# Altium PCB sm_Arm_Board.PcbDoc
Units mil, origin at the board's own origin, x right, y up, seen from the top; angles counter-clockwise.
Board outline 1531 x 1354 mil, 2 copper layers (Top Layer, Bottom Layer); 15 components, 18 nets, 88 pads, 20 vias.
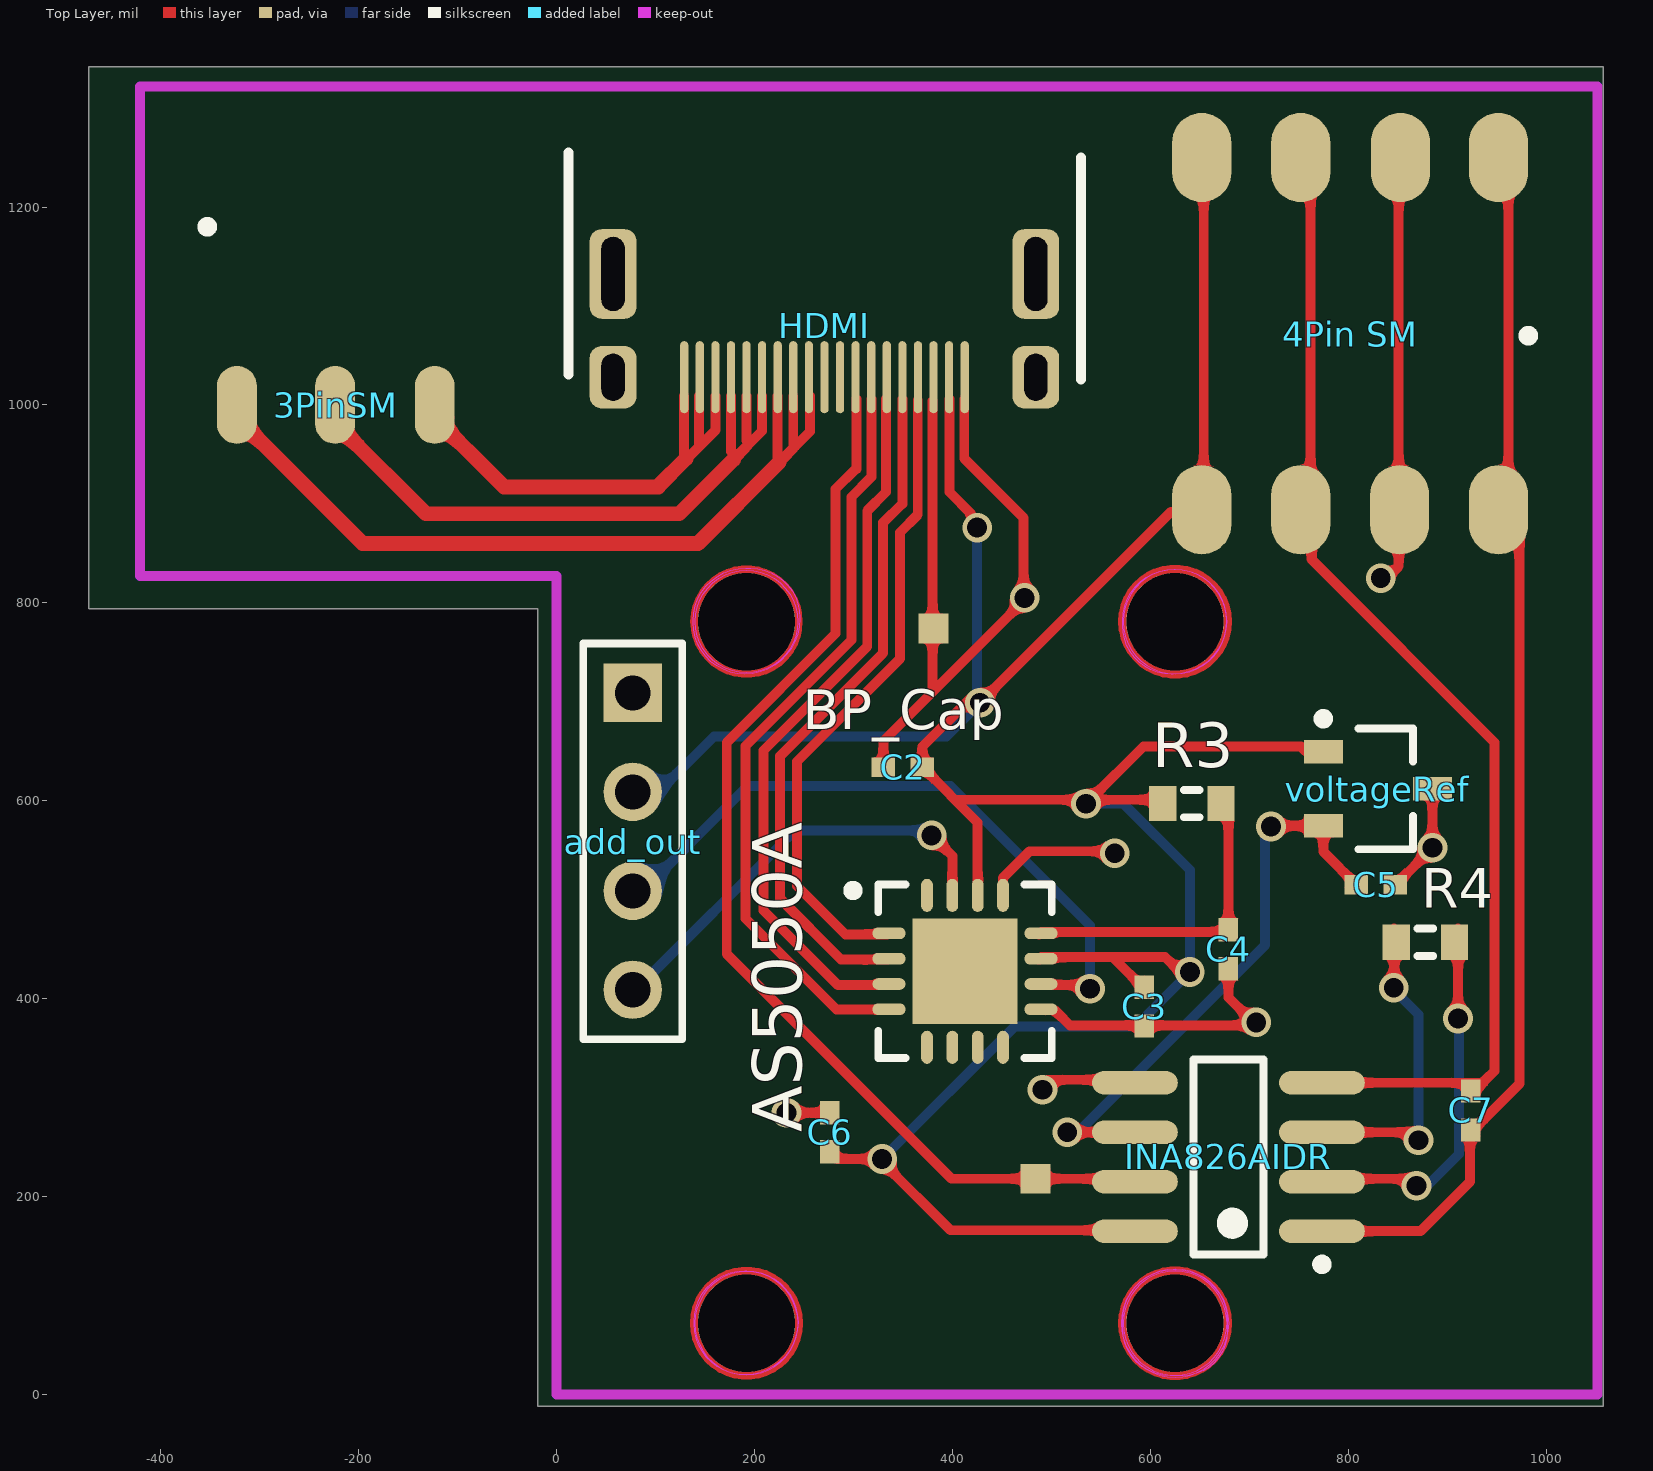
[diagram p0: Top Layer view]
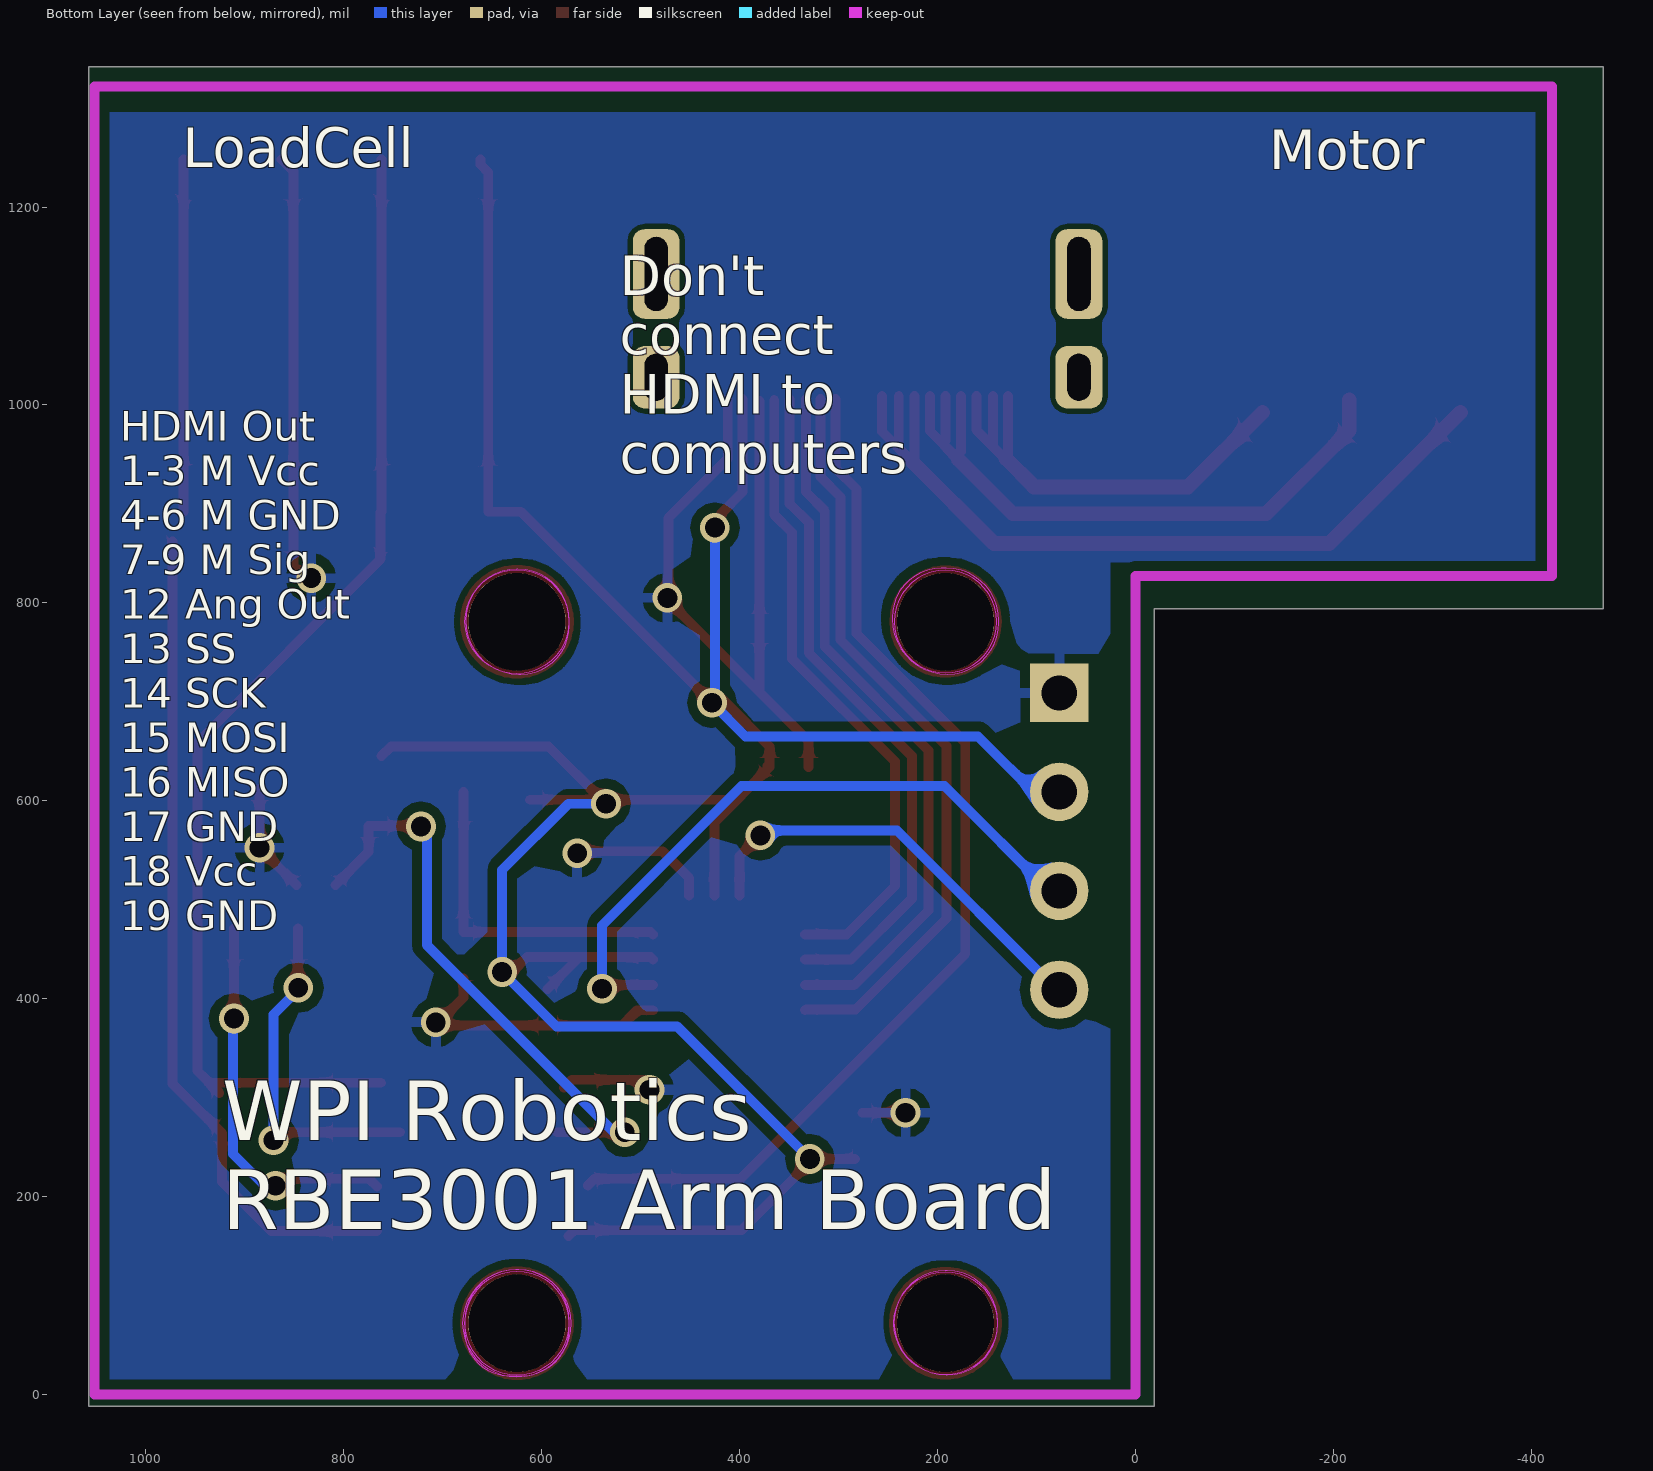
[diagram p1: Bottom Layer view, seen from below]

## Layer stack, top to bottom
Top Solder: solder mask 0.4, Solder Resist, Dk 3.5
Top Layer: signal copper 1.4
Dielectric 1: dielectric 12.6, FR-4, Dk 4.8
Bottom Layer: signal copper 1.4
Bottom Solder: solder mask 0.4, Solder Resist, Dk 3.5

## Board outline
-19,794 -19,-12 188,-12 1058,-12 1058,1342 -473,1342 -473,794
cut-out: 191.93,729.16 cw(c191.93,781) 140.09,781 cw(c191.93,781) 191.93,832.84 cw(c191.93,781) 243.77,781 cw(c191.93,781)
cut-out: 572.44,781 ccw(c625,781) 625,728.44 ccw(c625,781) 677.56,781 ccw(c625,781) 625,833.56 ccw(c625,781)
cut-out: 572.44,72 ccw(c625,72) 625,19.44 ccw(c625,72) 677.56,72 ccw(c625,72) 625,124.56 ccw(c625,72)
cut-out: 139.78,72 ccw(c191.93,72) 191.93,19.85 ccw(c191.93,72) 244.08,72 ccw(c191.93,72) 191.93,124.15 ccw(c191.93,72)
cut-out: 572.44,781 ccw(c625,781) 625,728.44 ccw(c625,781) 677.56,781 ccw(c625,781) 625,833.56 ccw(c625,781)
cut-out: 570.44,72 ccw(c625,72) 625,17.44 ccw(c625,72) 679.56,72 ccw(c625,72) 625,126.56 ccw(c625,72)
cut-out: 139.78,72 ccw(c191.93,72) 191.93,19.85 ccw(c191.93,72) 244.08,72 ccw(c191.93,72) 191.93,124.15 ccw(c191.93,72)
cut-out: 191.93,729.16 cw(c191.93,781) 140.09,781 cw(c191.93,781) 191.93,832.84 cw(c191.93,781) 243.77,781 cw(c191.93,781)
cut-out: 572,782 cw(c624,782) 624,834 625,834 cw(c625,782) 677,782 cw(c623,782) 623,728 621,728 cw(c621,777) 572,777
cut-out: 572,75 cw(c623,75) 623,126 626,126 cw(c626,74) 678,74 678,64 cw(c633,64) 633,19 620,19 cw(c620,67) 572,67
cut-out: 139,74 cw(c190,74) 190,125 192,125 cw(c192,73) 244,73 cw(c191,73) 191,20 190,20 cw(c190,71) 139,71
cut-out: 138,782 cw(c191,782) 191,835 196,835 cw(c196,785) 246,785 246,784 cw(c190,784) 190,728 cw(c190,780) 138,780

## Design rules (kind name [scope] priority, off if disabled: settings)
Clearance [InComponent('hdmi')] p1: gap=5
Clearance Clearance_2 [InNamedPolygon('BotGND')] p2: gap=10
Clearance Clearance_1 [(InNet('MOTOR_GND') AND InNet('MOTOR_SIG') AND InNet('MOTOR_VCC'))] p3: gap=12
Clearance Clearance_3 [All] p4: gap=6
ComponentClearance [All] p1: gap=10 collisioncheckmode=3 verticalgap=8 showdistances=FALSE
MinimumSolderMaskSliver [All] p1: minsoldermaskwidth=8
PolygonConnect [All] p1: connectstyle=Relief reliefconductorwidth=10 reliefentries=4 polygonreliefangle="90 Angle" airgapwidth=10
RoutingVias [All] p1: holewidth=28 width=50 viastyle="Through Hole" minholewidth=15 minwidth=20 maxholewidth=28 maxwidth=50
SolderMaskExpansion [All] p1: expansion=4
Width [(InNet('MOTOR_GND') AND InNet('MOTOR_SIG') AND InNet('MOTOR_VCC'))] p1: maxlimit=18 minlimit=10 preferedwidth=15
Width Width_1 [All] p2: maxlimit=18 minlimit=10 preferedwidth=10
28 further rules are at their usual default settings.

## Components (designator, comment, footprint, x,y, rotation, side; value= is the part's Value field where it differs from the comment)
3PinSM "Motor" 4PinSM -493,845 r0 top
"4Pin SM" "LoadCell" SOIC127P370X135-2N 952,1250 r180 top
add_out "Header 4" HDR1X4 77,709 r270 top
AS5050A "AS5050A" AS5050A 336,466 r0 top
C2 "Cap Semi" 0402 350,634 r0 top
C3 "Cap Semi" 0402 594,392 r90 top
C4 "Cap Semi" 0402 679,450 r90 top
C5 "Cap Semi" 0402 828,515 r180 top
C6 "Cap Semi" 0402 276,265 r270 top
C7 "Cap Semi" 0402 924,287 r90 top
HDMI "HDMI_Connector" SQFP50P1720X2320X245-38N 129,1028 r0 top
INA826AIDR "INA826AIDR" TI-D8_N 679,240 r180 top
R3 "Res3" J1-0603 642,597 r180 top
R4 "Res3" J1-0603 878,457 r0 top
voltageRef "voltageRef" SOT95P280X140-3N 830,612 r0 top

## Footprints (in the part's own frame and the unit in brackets; to place one, negate y for a bottom-side part, rotate by r counter-clockwise, add the part's x,y. Pads: shape width x height; smd on the part's side, far side on the other; paste and mask are expansions set on the pad)
4PinSM [mm]
  oval 1.02x2 smd: 3P1(9.398,3.937) 3P2(6.838,3.937) 3P3(4.318,3.937)
  silkscreen extent 3.43,8.38 3.68,8.64
0402 [mm] "Chip Capacitor, Body 1.0x0.5mm, IPC High Density"
  rect 0.6x0.5 smd: 1(-0.5,0) 2(0.5,0)
  body extent -0.55,-0.3 0.55,0.3, height 1.3
AS5050A [mm]
  oval 0.85x0.3 smd: 1(0,0) 2(0,-0.65) 3(0,-1.3) 4(0,-1.95) 9(3.9,-1.95) 10(3.9,-1.3) 11(3.9,-0.65) 12(3.9,0)
  oval 0.3x0.85 smd: 5(0.975,-2.925) 6(1.625,-2.925) 7(2.275,-2.925) 8(2.925,-2.925) 13(2.925,0.975) 14(2.275,0.975) 15(1.625,0.975) 16(0.975,0.975)
  rect 2.7x2.7 smd: 17(1.95,-0.975)
  silkscreen extent -1.05,-3.2 4.18,1.25, body extent -0.13,-3.05 4.03,1.1, height 0.9
HDR1X4 [mm] "Connector; Header; 4 Position"
  rect 1.5x1.5 hole 0.9: 1(0,0)
  round 1.5 hole 0.9: 2(2.54,0) 3(5.08,0) 4(7.62,0)
  silkscreen extent -1.27,-1.27 8.89,1.27
J1-0603 [mm] "Chip Resistor, Body 1.6x0.8mm, IPC High Density"
  rect 0.7x0.9 smd: 1(-0.75,0) 2(0.75,0)
  silkscreen extent -0.2,-0.35 0.2,0.35, body extent -0.85,-0.48 0.85,0.48, height 0.9
SOIC127P370X135-2N [mm] "SOIC, 2-Leads, Body 1.55x2.70mm, Pitch 1.27mm, IPC Medium Density"
  oval 1.52x2.29 smd: 4P1(0,9.04) 4P1(0,0) 4P2(2.52,0) 4P2(2.54,9.04) 4P3(5.08,9.04) 4P3(5.08,0) 4P4(7.62,9.04) 4P4(7.62,0)
  silkscreen extent -0.89,4.45 -0.64,4.7
SOT95P280X140-3N [mm] "SOT23, 3-Leads, Body 2.90x2.80mm, Pitch 0.95mm, IPC Medium Density"
  rect 1x0.6 smd: gnd_3(1.4,0) in_1(-1.4,0.95) out_2(-1.4,-0.95)
  silkscreen extent -1.52,-1.55 0.9,1.92, body extent -0.9,-1.55 0.9,1.55, height 1.4
SQFP50P1720X2320X245-38N [mm] "SQFP, 38-Leads, Body 14.00x14.00mm, Pitch 0.50mm, IPC Medium Density"
  rrect50% 1.2x1.6 hole 0.6 slot 1.2 at 90 deg: h1(-1.825,0) h1(9.025,0)
  rrect50% 1.2x2.3 hole 0.6 slot 1.9 at 90 deg: h1(-1.825,2.65) h1(9.025,2.65)
  oval 0.21x1.85 smd mask+0.08: hdmi_1(0,0) hdmi_2(0.4,0) hdmi_3(0.8,0) hdmi_4(1.2,0) hdmi_5(1.6,0) hdmi_6(2,0) hdmi_7(2.4,0) hdmi_8(2.8,0) hdmi_9(3.2,0) hdmi_10(3.6,0) hdmi_11(4,0) hdmi_12(4.4,0) hdmi_13(4.8,0) hdmi_14(5.2,0) hdmi_15(5.6,0) hdmi_16(6,0) hdmi_17(6.4,0) hdmi_18(6.8,0) hdmi_19(7.2,0)
  silkscreen extent -2.97,-0.06 10.19,5.77
TI-D8_N [mm] "SOIC, 8-Leads, Body 5x4mm, Pitch 1.27mm, IPC Medium Density"
  oval 2.2x0.6 smd: 1(-2.4,1.905) 2(-2.4,0.635) 3(-2.4,-0.635) 4(-2.4,-1.905) 5(2.4,-1.905) 6(2.4,-0.635) 7(2.4,0.635) 8(2.4,1.905)
  silkscreen extent -2.53,-2.5 0.9,2.88, body extent -2,-2.5 2,2.5, height 1.75

## Part data
3PinSM: library part 3PinSM
"4Pin SM": library part 4PinSM
add_out: "Header, 4-Pin"
C2 C3 C4 C5 C6 C7: "Capacitor (Semiconductor SIM Model)"
INA826AIDR: "Precision, 200-uA Supply Current, 36-V Supply Instrumentation Amplifier, -40 to 125 degC, 8-pin SOIC (D8), Green (RoHS & no Sb/Br)"
R3 R4: "Resistor"

## Free pads (board coordinates)
  round 98.43 hole 98.43 unplated paste+0: 2(191.93,72) 2(191.93,781)
  round 98.43 hole 98.43 unplated: 2(625,72) 2(625,781)
  rect 30x30 smd: 3(381,774) 3(484,218)

## Via types
v1: diameter 30, hole 20, Top Layer to Bottom Layer, tented both sides, 20 vias

## Nets (pads, with @x,y where several pads share a name; then routed paths per layer and width w, separated by ;. In a path a pad name is that pad's centre, name@x,y a point inside that pad or via, vN(x,y) a via of type N, cw(c..) or ccw(c..) an arc to the next point about the centre after c; other vN are vias at no path point)
GND: "4Pin SM.4P2" add_out.1 AS5050A.9 AS5050A.13 C2.1 C3.1 C4.1 C5.1 C6.1 HDMI.hdmi_17 HDMI.hdmi_19 INA826AIDR.5 pad.3@381,774 voltageRef.gnd_3 | length 1862
  Top Layer w10: v1(232.32,284.68) C6.1 ; C2.1 330.32,660.32 472,802 472,886 412,946 HDMI.hdmi_19@412,1006 ; 380,712 HDMI.hdmi_17@380,1004 ; AS5050A.13 451.16,522.16 478,549 562,549 v1(564,547) ; AS5050A.9@487.54,388.23 503.77,388.23 519,373 707,373 679,401 C4.1@679,420.31 ; v1(491,308) 501,318 569.51,318 INA826AIDR.5@577.51,310 ; v1@836,822 851,837 851,1236.21 862.79,1248 ; C5.1 v1(885.12,552.43) voltageRef.gnd_3
  other v1: 707,376 473,805 833,825
MOTOR_GND: 3PinSM.3P2 HDMI.hdmi_4 HDMI.hdmi_5 HDMI.hdmi_6 | length 714.1
  Top Layer w10: 151,917 179,945 ; HDMI.hdmi_4@176.2,1009 176.2,952.8 179,950 179,945 ; HDMI.hdmi_5@191.94,1009 191.94,964.06 194,962 194,960 ; HDMI.hdmi_6@207.69,1009 207.69,973.69 194,960 ; 179,945 194,960
  Top Layer w15: 3PinSM.3P2@-216,1005 -216,974 -132,890 124,890 179,945
MOTOR_SIG: 3PinSM.3P3 HDMI.hdmi_7 HDMI.hdmi_8 HDMI.hdmi_9 | length 841.6
  Top Layer w10: HDMI.hdmi_7@223.44,1009 223.44,943.56 225,942 241,958 ; HDMI.hdmi_8@239.19,1009 239.19,959.81 241,958 ; HDMI.hdmi_9@256,1009 256,973 241,958
  Top Layer w15: 3PinSM.3P3@-328.5,992.5 -196,860 143,860 225,942
MOTOR_VCC: 3PinSM.3P1 HDMI.hdmi_1 HDMI.hdmi_2 HDMI.hdmi_3 | length 490.4
  Top Layer w10: HDMI.hdmi_1@128.95,1009 128.95,948.05 131,946 ; 132,946 160.45,974.45 HDMI.hdmi_3@160.45,1009 ; 144,961 HDMI.hdmi_2@144,1009
  Top Layer w15: 3PinSM.3P1@-128.5,992.5 -53,917 103,917 ; 102,917 131,946
"Net4Pin SM_4P1": "4Pin SM.4P1" C7.1 INA826AIDR.1 | length 1200.8
  Top Layer w10: INA826AIDR.1@766.49,165 873,165 923,215 923,264 973,314 973,862 ; 962,892.09 962,1248
"Net4Pin SM_4P3": "4Pin SM.4P3" C7.2 INA826AIDR.4 | length 1198.5
  Top Layer w10: 762,892.09 762,1248 ; INA826AIDR.4@762.49,315 C7.2@932,315 ; 763,892.09 763,844 948,659 948,327 C7.2@925.84,304.84
Netadd_out_3: add_out.3 AS5050A.10 | length 684.5
  Top Layer w10: AS5050A.10@487.54,413.82 v1@532.82,413.82
  Bottom Layer w10: add_out.3@69,502 80,502 193,615 398,615 539,474 v1(539,410)
Netadd_out_4: add_out.4 AS5050A.15 | length 439.2
  Top Layer w10: v1(379,565) 399.98,544.02 AS5050A.15
  Bottom Layer w10: add_out.4@77,406 241,570 v1@379,570
NetAS5050A_1: AS5050A.1 HDMI.hdmi_16 | length 652.8
  Top Layer w10: AS5050A.1@334,465 292,465 243,514 243,639.49 347,743.49 347,871 365,889 HDMI.hdmi_16@365,1005
NetAS5050A_2: AS5050A.2 HDMI.hdmi_15 | length 689.5
  Top Layer w10: AS5050A.2@334,439.41 287.59,439.41 226,501 226,645.12 330,749.12 330,881 349,900 ; 349.42,900 HDMI.hdmi_15@349.42,1006
NetAS5050A_3: AS5050A.3 HDMI.hdmi_14 | length 724.5
  Top Layer w10: HDMI.hdmi_14@333,1006 333,912 314,893 314,755.75 209,650.75 209,489 284.18,413.82 AS5050A.3@334,413.82
NetAS5050A_4: AS5050A.4 HDMI.hdmi_13 | length 757.6
  Top Layer w10: 317,926 298,907 298,762.37 191,655.37 191,481 283,389 333.23,389 AS5050A.4@334,388.23 ; 318.43,927 HDMI.hdmi_13@318.43,1006
NetAS5050A_12: AS5050A.12 C4.2 R3.1 | length 334
  Top Layer w10: AS5050A.12@487.54,465 489.95,467.41 679,467.41 R3.1@679,609
NetC5_2: C5.2 INA826AIDR.6 voltageRef.out_2 | length 607.6
  Top Layer w10: v1@509.31,258.31 v1(516,265) INA826AIDR.6 ; v1@723.6,574.6 voltageRef.out_2 774.88,548.43 C5.2
  Bottom Layer w10: v1(516,265) 517,265 522,260 716,454 716,568 v1(722,574)
NetHDMI_hdmi_12: HDMI.hdmi_12 INA826AIDR.7 pad.3@484,218 | length 1093.3
  Top Layer w10: 302,935 282,915 282,769 172,659 172,445 399,218 546.51,218 INA826AIDR.7@553.51,211 ; 303,935 HDMI.hdmi_12@303,1006
NetINA826AIDR_2: INA826AIDR.2 R4.2 | length 383
  Top Layer w10: INA826AIDR.2@766.49,210 774.49,218 862,218 v1(869,211) ; v1(911,380) R4.2@911,471
  Bottom Layer w10: v1(869,211) 880,211 912,243 v1@912,370
NetINA826AIDR_3: INA826AIDR.3 R4.1 | length 355.5
  Top Layer w10: INA826AIDR.3@743,265 INA826AIDR.3 863,265 v1(871,257) ; v1@846.47,420.47 R4.1@846.47,471
  Bottom Layer w10: v1@838,417 871,384 v1(871,257)
  other v1: 846,411
VCC: "4Pin SM.4P4" add_out.2 AS5050A.11 AS5050A.14 C2.2 C3.2 C6.2 HDMI.hdmi_18 INA826AIDR.8 R3.2 voltageRef.in_1 | length 3251.8
  Top Layer w10: C6.2@283.32,238 v1(329,238) 329,235 398,166 567,166 INA826AIDR.8@573,160 ; HDMI.hdmi_18@397,1006 397,912 419,890 418,889 v1(425,876) ; 403.69,601 v1@539,601 ; AS5050A.14 425.57,578.12 C2.2 369.69,654.69 414,699 v1(428,699) ; v1@432,706 428,702 v1(428,699) ; AS5050A.11@487.54,439.41 490.13,442 615,442 640,417 v1(640,427) ; v1(535,597) v1@539,601 ; 564.28,439.41 C3.2@594,409.69 ; R3.2@612,601 v1@539,601 ; 662,1248 662,1243 654,1235 654,892.09 621.09,892.09 v1(428,699) ; voltageRef.in_1@761.88,645.4 752.28,655 593,655 v1@539,601
  Bottom Layer w10: add_out.2@77,602 96,602 159,665 394,665 v1(428,699) v1@427,700 ; v1(329,238) 463,372 585,372 v1(640,427) 640,530 573,597 v1(535,597) ; v1@425,710 v1(425,876)
pads on no net: AS5050A.5 AS5050A.6 AS5050A.7 AS5050A.8 AS5050A.16 AS5050A.17 HDMI.h1 HDMI.hdmi_10 HDMI.hdmi_11
copper on no net: | length 1313.8
  Top Layer w10: 243.77,781 ccw(c191.93,781) 243.77,781 ; 244.08,72 ccw(c191.93,72) 244.08,72 ; 677.56,72 ccw(c625,72) 677.56,72 ; 677.56,781 ccw(c625,781) 677.56,781

## Polygon pours and split planes (outlines as drawn)
GND on Bottom Layer "BotGND" (solid, remove dead copper, pour order 0): 25.66,13.34 1036.92,13.34 1036.92,1296 -404.08,1296 -404.08,853.34 -404.08,840.84 -391.58,840.84 25.66,840.84

## Keep-outs
Keep-Out Layer:
  lines w10: -421,827 -421,1322 1052,1322 1052,0 0,0 0,827 -421,827

## Silkscreen, mask and mechanical layers (free items; w line width, h text height)
Top Overlay:
  text "BP_Cap" at 249,672 h40
Bottom Overlay:
  text "LoadCell" at 963,1240 h40
  text "Motor" at -135,1238 h40
  text "Don't / connect / HDMI to / computers" at 521,931 h40
  text "HDMI Out / 1-3 M Vcc / 4-6 M GND / 7-9 M Sig / 12 Ang Out / 13 SS / 14 SCK / 15 MOSI / 16 MISO / 17 GND / 18 Vcc / 19 GND" at 1026,469 h30
  text "WPI Robotics / RBE3001 Arm Board" at 923,167 h60